# Altium PCB STCAutoDownload.PcbDoc
Units mil, origin at the board's own origin, x right, y up, seen from the top; angles counter-clockwise.
Board outline 1574.8 x 787.4 mil, 2 copper layers (Top Layer, Bottom Layer); 24 components, 20 nets, 81 pads, 13 vias.
Unrouted connection lines stored in the file: 15.
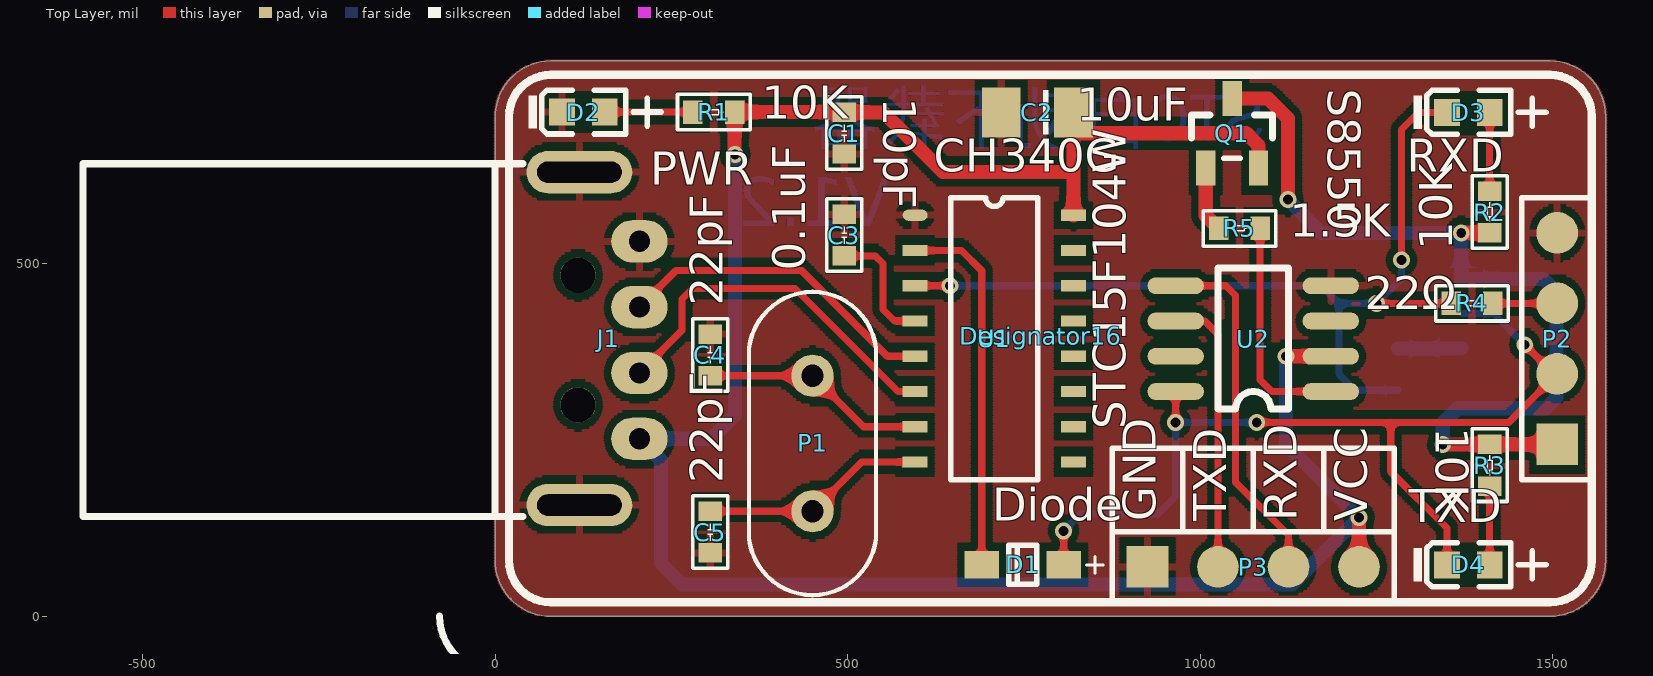
[diagram p0: Top Layer view]
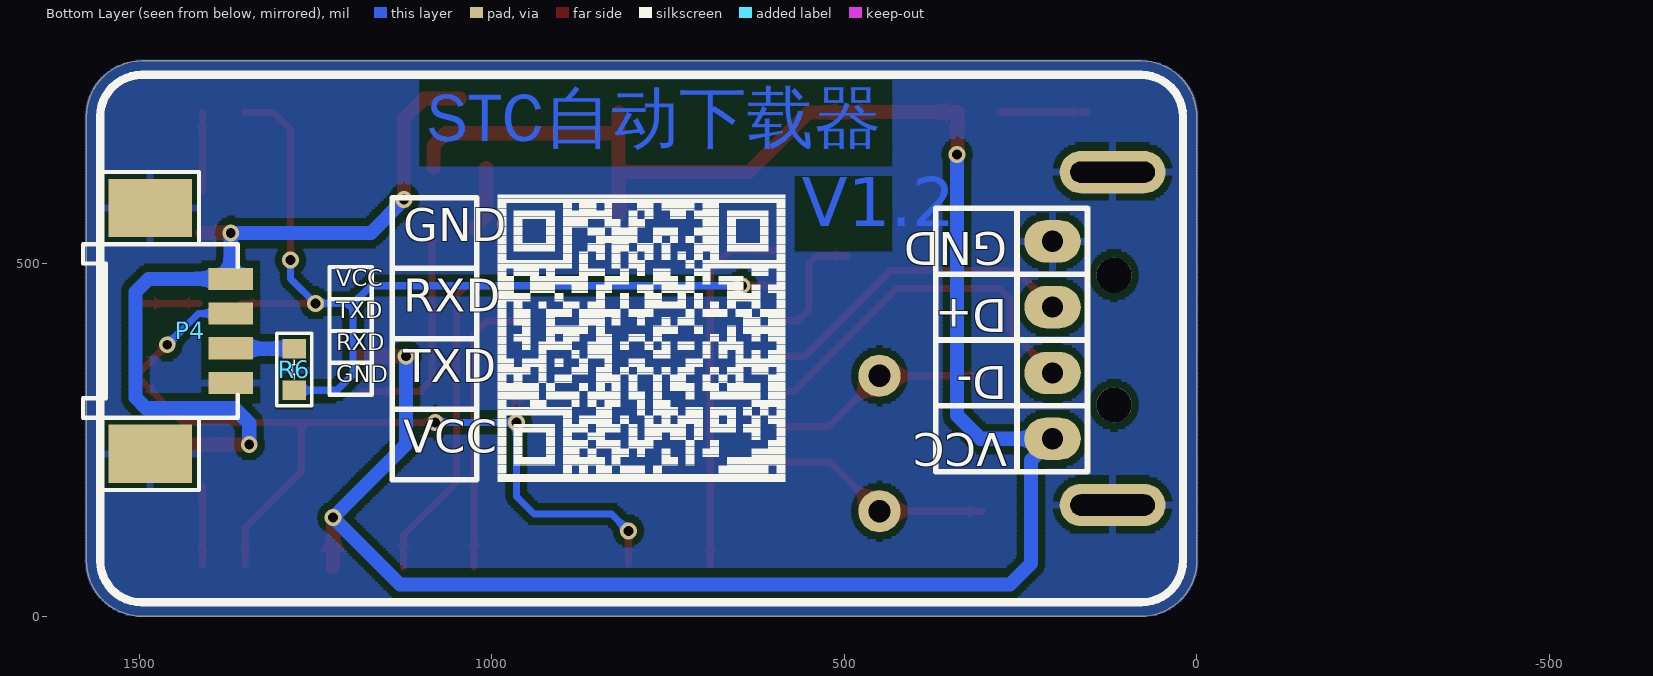
[diagram p1: Bottom Layer view, seen from below]
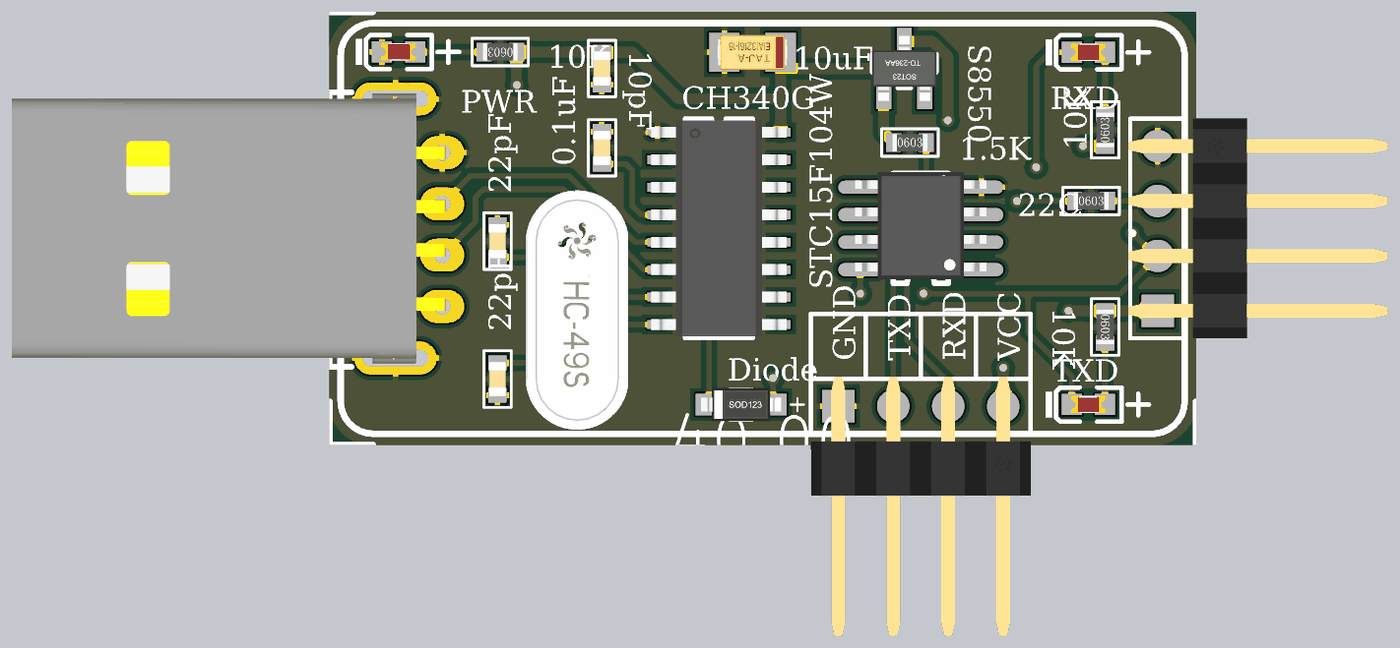
[diagram p2: 3D render of the assembled board from above, using the file's embedded part models]

## Layer stack, top to bottom
Top Solder: solder mask 0.4, Solder Resist, Dk 3.5
Top Layer: signal copper 1.4
Dielectric 1: dielectric 12.6, FR-4, Dk 4.8
Bottom Layer: signal copper 1.4
Bottom Solder: solder mask 0.4, Solder Resist, Dk 3.5

## Board outline
0,78.74 0,708.66 cw(c78.74,708.66) 78.74,787.4 1496.06,787.4 cw(c1496.06,708.66) 1574.8,708.66 1574.8,78.74 cw(c1496.06,78.74) 1496.06,0 78.74,0 cw(c78.74,78.74)

## Design rules (kind name [scope] priority, off if disabled: settings)
Clearance [All] p1: gap=10 ignorepadtopadclearanceinfootprint=FALSE except(0: Arc-Hole Track-Hole SMDPad-Hole THPad-Hole Via-Hole Fill-Hole Poly-Hole Region-Hole Text-Hole)
HoleSize [All] p1: absolutevalues=TRUE maxlimit=120 minlimit=1 maxpercent=80.000 minpercent=20.000
MinimumSolderMaskSliver [All] p1: minsoldermaskwidth=9
PolygonConnect [All] p1: connectstyle=Relief reliefconductorwidth=10 reliefentries=4 polygonreliefangle="90 Angle" airgapwidth=10
RoutingVias [All] p1: holewidth=14 width=24 viastyle="Through Hole" minholewidth=14 minwidth=24 maxholewidth=14 maxwidth=24
SilkToSilkClearance [All] p1: silktosilkclearance=0
SilkToSolderMaskClearance [IsPad] p1: minsilkscreentomaskgap=0 clearancetoexposedcopper=TRUE
SolderMaskExpansion [All] p1: expansion=4
Width [All] p1: maxlimit=30 minlimit=10 preferedwidth=10
26 further rules are at their usual default settings.

## Components (designator, comment, footprint, x,y, rotation, side; value= is the part's Value field where it differs from the comment)
C1 "10pF" 0603C 495,685 r90 top value=100pF
C2 "10uF" 钽电容 768.82,714.53 r180 top
C3 "0.1uF" 0603C 495,540.47 r270 top value=100pF
C4 "22pF" 0603C 305,370.59 r270 top value=100pF
C5 "22pF" 0603C 305,119.41 r90 top value=100pF
D1 "Diode" Diode 748.07,72.87 r0 top
D2 "LED" 0603LED 125,715 r0 top
D3 "LED" 0603LED 1380,714.53 r0 top
D4 "LED" 0603LED 1380,72.87 r0 top
Designator16 "Comment" 二维码 773.4,397.45 r0 top
J1 "USB-A-G" USB_A_G 161,393.7 r270 top
P1 "12MHz" "XTAL 12M" 450,245 r270 top
P2 "Header 4H" "Header 4" 1506,393.7 r90 top
P3 "Header 4" "Header 4" 1075,70 r0 top
P4 "Molex53261-0471" Molex53261-0471 1370,478.43 r270 bottom
Q1 "PNP" PNP 1045,685 r270 top
R1 "10K" 0603R 310,715 r180 top
R2 "10K" 0603R 1410.32,573.23 r90 top
R3 "10K" 0603R 1410.32,214.17 r270 top
R4 "22Ω" 0603R 1385,443.7 r0 top
R5 "1.5K" 0603R 1055.31,550 r0 top
R6 "22Ω" 0603R 1280,350 r90 bottom
U1 "CH340G" CH340G 595.59,568.7 r0 top
U2 "STC15F104W" STC15F104W 1185,318.7 r180 top

## Footprints (in the part's own frame and the unit in brackets; to place one, negate y for a bottom-side part, rotate by r counter-clockwise, add the part's x,y. Pads: shape width x height; smd on the part's side, far side on the other; paste and mask are expansions set on the pad)
0603C [mm] "VISHAY VJ贴片电容"
  rect 0.7x0.85 smd: 1(-0.75,0) 2(0.75,0)
  silkscreen extent -1.31,-0.64 1.31,0.64, body extent -0.8,-0.4 0.8,0.4, height 0.58
0603LED [mm] "0603 贴片LED"
  rect 0.93x0.98 smd: 1(0.77,0) 2(-0.77,0)
  silkscreen extent -1.97,-0.79 2.8,0.79, body extent -0.8,-0.4 0.8,0.4, height 0.6
0603R [mm] "电阻"
  rect 0.7x0.85 smd: 1(-0.75,0) 2(0.75,0)
  silkscreen extent -1.31,-0.64 1.31,0.64, body extent -0.8,-0.4 0.8,0.4, height 0.45
CH340G [mm] "USB to TTL Serial / UART"
  oval 0.9x0.4 smd: 1(0,0)
  rect 0.9x0.4 smd: 2(0,-1.27) 3(0,-2.54) 4(0,-3.81) 5(0,-5.08) 6(0,-6.35) 7(0,-7.62) 8(0,-8.89) 9(5.7,-8.89) 10(5.7,-7.62) 11(5.7,-6.35) 12(5.7,-5.08) 13(5.7,-3.81) 14(5.7,-2.54) 15(5.7,-1.27) 16(5.7,0)
  silkscreen extent 1.28,-9.53 4.42,0.64, body extent -0.28,-9.44 5.98,0.56, height 1.55
Diode [mm] "SOD-123"
  rect 1.25x1 smd: 1(1.475,0) 2(-1.475,0)
  silkscreen extent -0.5,-0.7 2.9,0.7, body extent -1.85,-0.77 1.85,0.78, height 1.35
"Header 4" [mm] "Connector; Header; 4 Position"
  rect 1.5x1.5 smd: 1(-3.81,0)
  round 1.5 smd: 2(-1.27,0) 3(1.27,0) 4(3.81,0)
  silkscreen extent -5.08,-1.27 5.08,1.27, body extent -5.08,-10.63 5.08,1.37, height 1.63
Molex53261-0471 [mm] "molex 连接器"
  rect 0.8x1.6 smd: 1(0,0) 2(1.25,0) 3(2.5,0) 4(3.75,0)
  rect 2.1x3 smd: pad(-2.55,-2.9) pad(6.3,-2.9)
  silkscreen extent -3.85,-5.32 7.6,0.25, body extent -3.2,-4.83 6.95,0.37, height 3.41
PNP [mm] "SOT-23(SOT-23-3)"
  rect 1.25x0.7 smd: 1(1.25,-0.95) 2(1.25,0.95) 3(-1.25,0)
  silkscreen extent -0.65,-1.46 0.9,1.46, body extent -1.5,-1.5 1.5,1.5, height 1.3
STC15F104W [mil] "SO8"
  oval 80x24 smd: 1(0,0) 2(0,-50) 3(0,-100) 4(0,-150) 5(220,-150) 6(220,-100) 7(220,-50) 8(220,0)
  silkscreen extent 60,-175 160,25, body extent -9,-177 229,17, height 74
USB_A_G [mil]
  oval 60x80 hole 30: 1(142,43.5) 2(48.67,43.5) 3(-44.67,43.5) 4(-138,43.5)
  oval 60x150 hole 30 slot 120 at 90 deg: 5(-236,-41.5) 6(236,-41.5)
  round 50 hole 50: 7(-90,-43.5) 8(94,-43.5)
  silkscreen extent -248,-746 252,-121, body extent -246,-740 246,49, height 128
"XTAL 12M" [mil] "晶体振荡器"
  round 60 hole 31.5: 1(-96.06,0) 2(96.06,0)
  silkscreen extent -215,-90 215,90, body extent -218,-92 218,92, height 143
二维码 [mil]
钽电容 [mm] "A 型钽电容封装"
  rect 1.4x1.8 smd: 1(-1.3,0) 2(1.3,0)
  silkscreen extent -0.4,-0.8 -0.2,0.8, body extent -1.6,-0.8 1.6,0.8, height 1.62

## Part data
C1 C3 C4 C5: library part 0603C, "Capacitor", LatestRevisionDate=17-Jul-2002, LatestRevisionNote="Re-released for DXP Platform.", PackageDescription="Radial Cap, Thru-Hole; 2 Leads; 0.3 in Pin Spacing", PackageReference=RAD-0.3, Published=8-Jun-2000, Publisher="Altium Limited"
C2: library part 钽电容, "钽电容", LatestRevisionDate=17-Jul-2002, LatestRevisionNote="Re-released for DXP Platform.", PackageReference=RB7.6-15, Published=8-Jun-2000, Publisher="Altium Limited"
D1: "二极管", PackageDocument=Sep-1996, Code_JEDEC=DO-214-AB, LatestRevisionDate=17-Jul-2002, LatestRevisionNote="Re-released for DXP Platform.", PackageReference=SMC, Published=8-Jun-2000, Publisher="Altium Limited"
D2 D3 D4: library part 0603LED, "Typical INFRARED GaAs LED", LatestRevisionDate=08-Jul-2005, LatestRevisionNote="Mech Layer 1 removed.", PackageDescription="LED; 2 Leads", PackageReference=LED-0, Published=8-Jun-2000, Publisher="Altium Limited"
J1: "USB-A 插头"
P1: library part "XTAL 12M", "12MHZ振荡器[2PIN]"
P2 P3: "Header, 4-Pin", LatestRevisionDate=17-Jul-2002, LatestRevisionNote="Re-released for DXP Platform.", Publisher="Altium Limited"
P4: "Header, 4-Pin, Molex53261-0471", LatestRevisionDate=17-Jul-2002, LatestRevisionNote="Re-released for DXP Platform.", Publisher="Altium Limited"
Q1: "PNP Bipolar Transistor", Code_JEDEC=SOT-23, LatestRevisionDate=17-Jul-2002, LatestRevisionNote="Re-released for DXP Platform.", PackageReference=SOT-23B, Published=8-Jun-2000, Publisher="Altium Limited"
R1 R2 R3 R4 R5 R6: library part 0603R, "电阻"
U1: "USB to TTL Serial / UART"

## Via types
v1: diameter 24, hole 14, Top Layer to Bottom Layer, tented both sides, 13 vias

## Nets (pads, with @x,y where several pads share a name; then routed paths per layer and width w, separated by ;. In a path a pad name is that pad's centre, name@x,y a point inside that pad or via, vN(x,y) a via of type N, cw(c..) or ccw(c..) an arc to the next point about the centre after c; other vN are vias at no path point)
GND: C1.1 C2.2 C3.1 C4.1 C5.1 D2.2 J1.4 J1.5 J1.6 P2.4 P3.1 P4.4 P4.pad U1.1 U2.4
NetC3_2: C3.2 U1.4 | length 176.9
  Top Layer w10: C3.2 539.06,510.94 550,500 550,435 566.3,418.7 U1.4
NetC4_2: C4.2 P1.1 U1.7 | length 320.6
  Top Layer w10: C4.2 P1.1 522.36,268.7 U1.7
NetC5_2: C5.2 P1.2 U1.8 | length 319.5
  Top Layer w10: C5.2 P1.2 519.76,218.7 U1.8
NetD1_2: D1.2 U1.2 | length 523.4
  Top Layer w10: U1.2 661.3,518.7 690,490 D1.2
NetD2_1: D2.1 R1.2 | length 125.2
  Top Layer w10: D2.1 R1.2
NetD3_1: D3.1 R2.2 | length 111.8
  Top Layer w10: R2.2 D3.1
NetD4_1: D4.1 R3.2 | length 111.8
  Top Layer w10: D4.1 R3.2
NetJ1_2: J1.2 U1.6 | length 527.4
  Top Layer w10: J1.2 265,405.53 265,450 280,465 425,465 571.3,318.7 U1.6
NetJ1_3: J1.3 U1.5 | length 462.7
  Top Layer w10: J1.3 256.13,490 434.75,490 556.05,368.7 U1.5
NetP2_3: P2.3 R4.2 | length 91.5
  Top Layer w10: R4.2 P2.3
NetP4_3: P4.3 R6.2 | length 90.2
  Bottom Layer w20: R6.2 1369.53,379.53 P4.3
NetQ1_1: Q1.1 R5.1 | length 93.3
  Top Layer w20: Q1.1 1007.6,568.19 R5.1
NetR5_2: R5.2 U2.1 | length 321.8
  Top Layer w10: R5.2 1084.84,335.16 1101.3,318.7 U2.1
RXD: D3.2 R4.1 R6.1 U1.3 | length 1299.2
  Top Layer w10: U1.3 v1(645,468.7) ; v1(1250,443.7) R4.1 ; v1(1285,505) 1285,690 1309.53,714.53 D3.2
  Bottom Layer w10: v1(645,468.7) 1171.3,468.7 1196.3,443.7 ; R6.1 1219.53,320.47 1196.3,343.7 1196.3,443.7 ; v1(1285,505) 1285,478.7 v1(1250,443.7) 1196.3,443.7
ST_RXD: P3.3 U2.5 | length 506.7
  Top Layer w10: U2.5 1036.3,468.7 1050,455 1050,190 1125,115 P3.3
ST_TXD: P3.2 U2.6 | length 397.7
  Top Layer w10: U2.6 1006.3,418.7 1025,400 P3.2
TXD: D1.1 D4.2 P2.2 P4.2 U2.8 | length 1352.1
  Top Layer w10: D1.1 v1(806.14,121.14) ; v1(965,275) U2.8 ; v1(1080,275) 1270,275 ; D4.2 1349.69,125.31 1270,205 1270,275 ; v1(1460,385) 1501.3,343.7 P2.2 1437.3,275 1270,275
  Bottom Layer w10: v1(806.14,121.14) 830,145 940,145 965,170 v1(965,275) v1(1080,275) ; P4.2 1415.79,429.21 v1(1460,385)
VCC: P2.1 P4.1 Q1.3 R2.1 R3.1 | length 1238.1
  Top Layer w20: Q1.3 1095.79,734.21 1124.21,705.79 v1(1124.21,590.79) ; v1(1343.7,243.7) R3.1 P2.1 ; v1(1370,543.7) R2.1
  Bottom Layer w20: v1(1124.21,590.79) 1171.3,543.7 v1(1370,543.7) P4.1 1486.57,478.43 1505,460 1505,310 1490,295 1365,295 1343.7,273.7 v1(1343.7,243.7)
VCC_IN: C1.2 C2.1 J1.1 P3.4 Q1.2 R1.1 U1.16 U2.2 | length 3181.2
  Top Layer w20: v1(340,655) 339.53,655.47 R1.1 494.53,715 C1.2 550.47,714.53 635,630 820,630 ; U1.16 820,630 ; C2.1 C2.1@820,679.33 ; Q1.2 1082.4,667.6 1065,685 825.67,685 C2.1@820,679.33 ; v1(1121.3,368.7) U2.2 ; P3.4 v1(1225,140) ; 820,630 C2.1@820,679.33
  Bottom Layer w20: v1(340,655) 340,285 306.7,251.7 J1.1 235,221.2 235,75 265,45 1130,45 v1(1225,140) 1121.3,243.7 v1(1121.3,368.7)
pads on no net: J1.7 J1.8 U1.9 U1.10 U1.11 U1.12 U1.13 U1.14 U1.15 U2.3 U2.7

## Polygon pours and split planes (outlines as drawn)
GND on Bottom Layer "GND_L02_P004" (hatched Horizontal grid 4 track 5, remove dead copper, pour order 4): 0,78.74 0,708.66 cw(c78.74,708.66) 78.74,787.4 1496.06,787.4 cw(c1496.06,708.66) 1574.8,708.66 1574.8,78.74 cw(c1496.06,78.74) 1496.06,0 78.74,0 cw(c78.74,78.74)
GND on Top Layer "GND_L01_P005" (hatched Horizontal grid 4 track 5, remove dead copper, pour order 5): 0,78.74 0,708.66 cw(c78.74,708.66) 78.74,787.4 1496.06,787.4 cw(c1496.06,708.66) 1574.8,708.66 1574.8,78.74 cw(c1496.06,78.74) 1496.06,0 78.74,0 cw(c78.74,78.74)

## Other copper
Top Layer:
  pour cut-out: 1121.3,368.7 1213,368.7 1213,278 1210,275 1080,275
Bottom Layer:
  text "STC自动下载器" at 1092.54,650 h120
  text "V1.2" at 559.92,530 h120

## Silkscreen, mask and mechanical layers (free items; w line width, h text height)
Top Overlay:
  lines w7.87: 875,120 875,238.11 1275,238.11 1275,120 ; 975,120 975,238.11 ; 1075,120 1075,238.11 ; 1175,120 1175,238.11
  lines w10: -78.74,0 ccw(c0,0) 0,-78.74
  lines w11.81: 19.69,78.74 ccw(c78.74,78.74) 78.74,19.69 1496.06,19.68 ccw(c1496.06,78.74) 1555.12,78.74 1555.12,708.66 ccw(c1496.06,708.66) 1496.06,767.72 78.74,767.72 ccw(c78.74,708.66) 19.69,708.66 19.69,78.74
  text "S8550" at 1165,747.87 h80 r270
  text "10pF" at 535,735.62 h80 r270
  text "10K" at 378.01,690 h80
  text "10uF" at 825,687.22 h80
  text "CH340G" at 621.84,615 h80
  text "RXD" at 1292.6,615 h80
  text "PWR" at 220,596.62 h80
  text "1.5K" at 1126.57,522.81 h80
  text "10K" at 1372.67,519.29 h80 r90
  text "0.1uF" at 455,489.67 h80 r90
  text "22pF" at 338.6,440 h80 r90
  text "22Ω" at 1233,420 h80
  text "10K" at 1318.28,268.11 h80 r270
  text "STC15F104W" at 910,264.87 h80 r90
  text "22pF" at 338.6,188.82 h80 r90
  text "GND" at 952.19,135 h80 r90
  text "TXD" at 1052.19,135 h80 r90
  text "RXD" at 1152.19,135 h80 r90
  text "VCC" at 1252.27,135 h80 r90
  text "Diode" at 704.9,120 h80
  text "TXD" at 1295.56,118 h80
Bottom Overlay:
  lines w6: 1170,359.33 1230,359.33 ; 1170,404.61 1230,404.61 ; 1170,449.88 1230,449.88 ; 1170,495 1170,314.06 1230,314.06 1230,495.16 1170,495.16
  lines w8: 155,298.37 370,298.37 ; 155,391.7 370,391.7 ; 155,485.03 370,485.03 ; 255,205.03 255,578.37 ; 1021,293.7 1141,293.7 ; 1021,393.7 1141,393.7 ; 1021,493.7 1141,493.7 ; 155,205.03 370,205.03 370,578.37 155,578.37 155,205.03 ; 1021,193.7 1021,593.7 1141,593.7 1141,193.7 1021,193.7
  lines w11.81: 19.69,78.74 ccw(c78.74,78.74) 78.74,19.69 1496.06,19.68 ccw(c1496.06,78.74) 1555.12,78.74 1555.12,708.66 ccw(c1496.06,708.66) 1496.06,767.72 78.74,767.72 ccw(c78.74,708.66) 19.69,708.66 19.69,78.74
  text "GND" at 269,560 h80 r180
  text "GND" at 1125,516.51 h80
  text "D+" at 269,465 h80 r180
  text "VCC" at 1220,460 h40
  text "RXD" at 1125,416.48 h80
  text "TXD" at 1220,414.72 h40
  text "D-" at 269,370 h80 r180
  text "RXD" at 1220,369.45 h40
  text "GND" at 1220,324.17 h40
  text "TXD" at 1125,316.46 h80
  text "VCC" at 269,275 h80 r180
  text "VCC" at 1125,216.43 h80
Bottom Solder:
  text "STC自动下载器" at 1112.54,630 h120
  text "V1.2" at 579.92,510 h120
Mechanical 1:
  the board outline again, w7.87

## Dimensions
0,78.74 to 1574.8,78.74 on Top Overlay
78.74,0 to 78.74,787.4 on Top Overlay

## Text inside footprints (layer, text, board x,y; h text height)
C2: Mechanical 15 "-" at 733.82,729.53 h59.06 r180; Mechanical 15 "+" at 823.82,734.53 h59.06 r180